# EAGLE board stylophone (EAGLE 6.6.0)
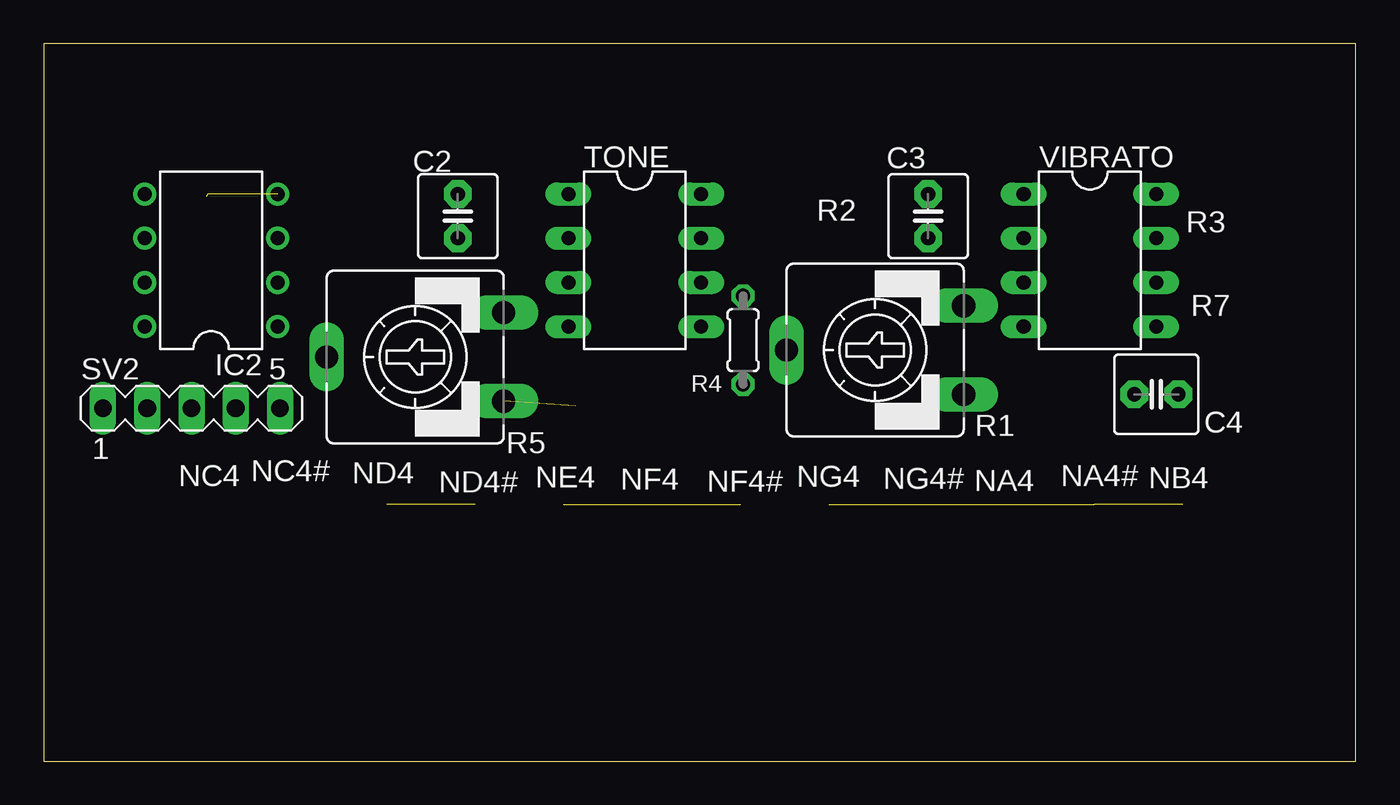
[diagram p0: board, top side]
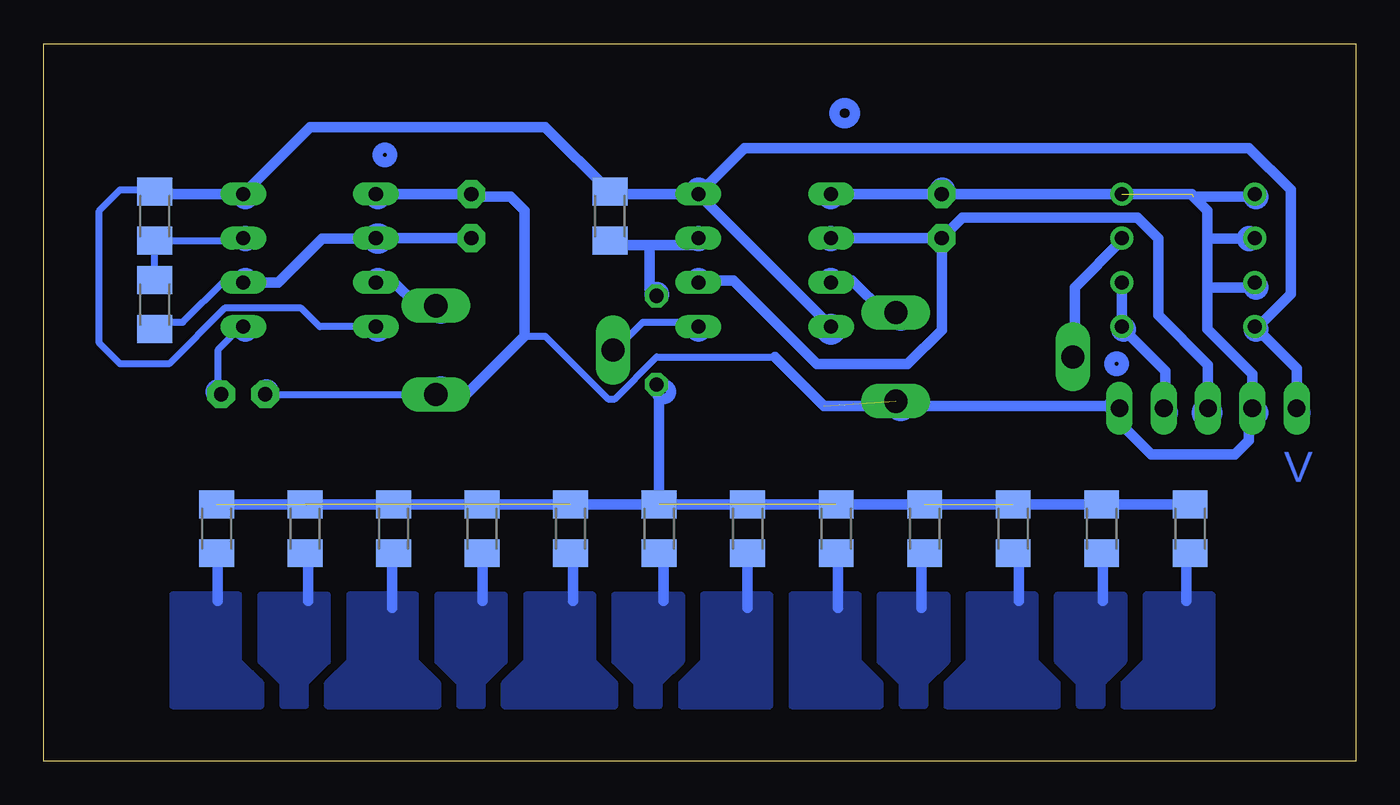
[diagram p1: board, bottom side, seen from below]

Size 75.34 x 41.2 mm. Coordinates in mm from the lower left corner, seen from the top.
Outline: 0,0 75.34,0 75.34,41.2 0,41.2 0,0
Copper layers (1*16): Top 0.035mm / dielectric 1.5mm / Bottom 0.035mm
Design rules "OpenLab": minimum track width 0.4mm, minimum drill 0.6mm, track to track 0.5mm, track to pad 0.5mm, pad to pad 0.5mm, via to via 0.5mm, smd to smd 0.1mm, copper to edge 2mm, drill to drill 0.2mm, minimum pad ring 10mil, minimum via ring 8mil, stop-mask expansion 4mil, vias tented up to drill 0mil, thermal gap 10mil

## Footprints (pad centres in the part's own frame; a part is rotated, then mirrored left to right if it is on the bottom)
C2.5-5 = drill 0.813 pad 1.6 octagon: 1 -1.27,0; 2 1.27,0
DIL08 = drill 0.813 pad 1.27: 1 -3.81,-3.81; 2 -1.27,-3.81; 3 1.27,-3.81; 4 3.81,-3.81; 5 3.81,3.81; 6 1.27,3.81; 7 -1.27,3.81; 8 -3.81,3.81
M1206 = smd 1.6 x 2: 1 -1.4,0; 2 1.4,0
CA9V = drill 1.321 long: A -2.54,-5.08; E 2.54,-5.08; S 0,5.08
0204/5 = drill 0.813 octagon: 1 -2.54,0; 2 2.54,0
MA05-1 = drill 1.016 long: 1 -5.08,0; 2 -2.54,0; 3 0,0; 4 2.54,0; 5 5.08,0
DIL-08 = drill 0.813 long: 1 -3.81,-3.81; 2 -1.27,-3.81; 3 1.27,-3.81; 4 3.81,-3.81; 5 3.81,3.81; 6 1.27,3.81; 7 -1.27,3.81; 8 -3.81,3.81

## Placement (x,y rotation side)
C2  100n  [C2.5-5]  23.78,31.29 90 top
C3  1u  [C2.5-5]  50.78,31.29 90 top
C4  10n  [C2.5-5]  63.88,21.06 180 top
IC2  LM358N  [DIL08]  9.62,28.75 90 top
NA4  [M1206]  55.24,13.34 90 bottom
NA4#  [M1206]  60.32,13.34 90 bottom
NB4  [M1206]  65.4,13.34 90 bottom
NC4  [M1206]  9.52,13.34 90 bottom
NC4#  [M1206]  14.6,13.34 90 bottom
ND4  [M1206]  19.68,13.34 90 bottom
ND4#  [M1206]  24.76,13.34 90 bottom
NE4  [M1206]  29.84,13.34 90 bottom
NF4  [M1206]  34.92,13.34 90 bottom
NF4#  [M1206]  40,13.34 90 bottom
NG4  [M1206]  45.08,13.34 90 bottom
NG4#  [M1206]  50.16,13.34 90 bottom
R1  [CA9V]  47.74,23.6 90 top
R2  1k  [M1206]  42.83,31.29 270 bottom
R3  150k  [M1206]  68.96,31.29 270 bottom
R4  [0204/5]  40.16,24.17 270 top
R5  [CA9V]  21.34,23.2 90 top
R7  10k  [M1206]  68.96,26.21 270 bottom
SV2  [MA05-1]  8.49,20.26 0 top
TONE  NE555  [DIL-08]  33.94,28.75 270 top
VIBRATO  NE555  [DIL-08]  60.07,28.75 270 top

## Library data of the parts
C2-C4 = capacitor-wima
IC2 = linear
NA4 NA4# NB4 NC4 NC4# ND4 ND4# NE4 NF4 NF4# NG4 NG4# R2 R3 R7 = resistor
R1 R5 = pot
R4 = rcl
SV2 = con-lstb; OC_FARNELL: unknown; OC_NEWARK: unknown
TONE VIBRATO = st-microelectronics; MF: Arrow Electronics; MPN: NE555N; OC_FARNELL: 1467742; OC_NEWARK: 89K1486

## Nets
GND: C2.2 C3.2 C4.2 IC2.4 R1.A R5.A SV2.2 SV2.5 TONE.1 VIBRATO.1
KEYBOARD: NA4#.2 NA4.2 NB4.2 NC4#.2 NC4.2 ND4#.2 ND4.2 NE4.2 NF4#.2 NF4.2 NG4#.2 NG4.2 R4.2
N$1: C4.1 VIBRATO.5
N$2: R1.E VIBRATO.3
N$3: R3.2 R7.1 VIBRATO.7
N$5: IC2.3 R5.S
NOTE: R2.2 R4.1 TONE.7
NOTSTYLUS: C3.1 R7.2 VIBRATO.2 VIBRATO.6
OUTPUT: IC2.1 IC2.2 SV2.4
STYLUS: C2.1 SV2.3 TONE.2 TONE.6
TONE: R5.E TONE.3
VCC: IC2.8 R2.1 R3.1 SV2.1 TONE.4 TONE.8 VIBRATO.4 VIBRATO.8
VIBRATO: R1.S TONE.5

## Tracks (layer width: path | path; a pad name or v marks a point on that pad's centre or on a via)
GND  (3 unrouted)
  Bottom 0.406: C4.2 R1.A 51.08,21.06 | 50.62,32.4 C3.2 | 47.74,24.4 46.54,24.4 42.94,20.8 42.54,20.8 40.14,23.2 33.34,23.2
  Bottom 0.61: 51.08,21.06 47.74,24.4 47.74,31.6 48.54,32.4 50.62,32.4 | VIBRATO.1 C3.2 | 33.34,23.2 30.54,20.4 13.71,20.4 SV2.5 13.57,19.43 11.74,17.6 6.94,17.6 6.14,18.4 6.14,20.07 SV2.2 5.95,22.21 8.54,24.8 8.54,27.2 | TONE.1 C2.2 9.43,32.56 | 8.54,27.2 8.54,30 | 8.54,30 8.54,31.6 9.34,32.4 6.14,32.4 | 8.54,27.2 5.74,27.2 | 8.54,30 5.74,30
KEYBOARD  (7 unrouted)
  Bottom 0.61: NC4.2 NC4#.2 ND4.2 NF4#.2 | NF4#.2 NB4.2 | NF4#.2 40,21.47 R4.2
N$1
  Bottom 0.406: VIBRATO.5 64,24.94 65.34,23.6 65.34,21.25 C4.1
N$2
  Bottom 0.61: R1.E 53.88,26.14 55.34,27.6 56.14,27.6 VIBRATO.3
N$3
  Bottom 0.406: R7.1 R3.2 64.01,29.89 VIBRATO.7
N$5
  Bottom 0.61: IC2.3 13.43,29.91 16.14,27.2 16.14,23.32 R5.S
N$7
  Bottom 0.61: 9.74,12 9.74,9.2
  pour Bottom: 8.25,9.53 12.06,9.53 12.06,5.72 13.33,4.45 13.33,3.18 8.25,3.18
N$9
  Bottom 0.61: 14.54,11.6 14.54,9.2
  pour Bottom: 15.87,3.18 15.87,4.45 17.14,5.72 17.14,9.53 13.33,9.53 13.33,5.72 14.6,4.45 14.6,3.18
N$10
  Bottom 0.61: 19.34,11.6 19.34,9.2
  pour Bottom: 17.14,3.18 17.14,4.45 18.41,5.72 18.41,9.53 22.22,9.53 22.22,5.72 23.49,4.45 23.49,3.18
N$11
  Bottom 0.61: 24.94,12 24.94,8.8
  pour Bottom: 26.03,3.18 26.03,4.45 27.3,5.72 27.3,9.53 23.49,9.53 23.49,5.72 24.76,4.45 24.76,3.18
N$12
  Bottom 0.61: 29.74,12 29.74,8.8
  pour Bottom: 32.38,9.53 32.38,3.18 27.3,3.18 27.3,4.45 28.57,5.72 28.57,9.53
N$14
  Bottom 0.61: 34.94,12 34.94,8.8
  pour Bottom: 33.65,9.53 37.46,9.53 37.46,5.72 38.73,4.45 38.73,3.18 33.65,3.18
N$15
  Bottom 0.61: 39.74,11.6 39.74,9.2
  pour Bottom: 41.27,3.18 41.27,4.45 42.54,5.72 42.54,9.53 38.73,9.53 38.73,5.72 40,4.45 40,3.18
N$16
  Bottom 0.61: 44.94,11.6 44.94,9.2
  pour Bottom: 42.54,3.18 42.54,4.45 43.81,5.72 43.81,9.53 47.62,9.53 47.62,5.72 48.89,4.45 48.89,3.18
N$17
  Bottom 0.61: 50.14,12 50.14,9.2
  pour Bottom: 51.43,3.18 51.43,4.45 52.7,5.72 52.7,9.53 48.89,9.53 48.89,5.72 50.16,4.45 50.16,3.18
N$18
  Bottom 0.61: 55.34,11.6 55.34,8.8
  pour Bottom: 52.7,3.18 52.7,4.45 53.97,5.72 53.97,9.53 57.78,9.53 57.78,5.72 59.05,4.45 59.05,3.18
N$19
  Bottom 0.61: 60.14,11.6 60.14,9.2
  pour Bottom: 61.59,3.18 61.59,4.45 62.86,5.72 62.86,9.53 59.05,9.53 59.05,5.72 60.32,4.45 60.32,3.18
N$20
  Bottom 0.61: 65.34,11.6 65.34,9.2
  pour Bottom: 67.94,9.53 67.94,3.18 62.86,3.18 62.86,4.45 64.13,5.72 64.13,9.53
NOTE
  Bottom 0.406: 42.56,29.62 R2.2
  Bottom 0.61: 42.56,29.62 40.52,29.62 | TONE.7 38.15,29.62 40.52,29.62 | 40.52,29.62 40.54,29.6 40.54,27.09 R4.1
NOTSTYLUS
  Bottom 0.406: R7.2 68.57,25.2 67.34,25.2 64.94,27.6 64,27.6 VIBRATO.6
  Bottom 0.61: VIBRATO.6 61.86,27.48 59.34,30 56.28,30 VIBRATO.2 C3.1
OUTPUT
  Bottom 0.61: IC2.2 IC2.1 13.43,24.89 10.94,22.4 10.94,20.35 SV2.4
STYLUS
  Bottom 0.61: C2.1 TONE.2 | C2.1 23.78,24.76 25.74,22.8 30.94,22.8 35.74,27.6 37.63,27.6 TONE.6 | SV2.3 8.49,22.75 11.34,25.6 11.34,30 12.54,31.2 22.6,31.2 C2.1
TONE
  Bottom 0.61: R5.E 27.08,25.74 28.94,27.6 30.01,27.6 TONE.3
VCC
  Bottom 0.406: VIBRATO.4 59.48,24.94 60.54,26 64.94,26 68.14,22.8 70.94,22.8 72.14,24 72.14,31.6 70.94,32.8 69.07,32.8 R3.1
  Bottom 0.61: TONE.8 42.83,32.56 R2.1 46.54,36.4 60.04,36.4 VIBRATO.8 68.83,32.56 R3.1 | TONE.4 TONE.8 | SV2.1 3.41,22.54 IC2.8 5.6,24.94 3.74,26.8 3.74,32.8 6.14,35.2 35.11,35.2 TONE.8
VIBRATO
  Bottom 0.406: R1.S 42.54,23.6 40.94,25.2 38.01,25.2 TONE.5
(copper drawn outside any net)
  shapes: Bottom circle x41

## Text on the board
Bottom: V